# Altium PCB POT 10x8.PcbDoc (part 2 of 4)
Units mm, origin at the board's own origin, x right, y up, seen from the top; angles counter-clockwise.
Board outline 152.4 x 101.6 mm, 4 copper layers (Top Layer, Mid Layer 1, Mid Layer 2, Bottom Layer), stack 0.97 mm thick; 324 components, 355 nets, 1533 pads, 300 vias.
Unrouted connection lines stored in the file: 224.
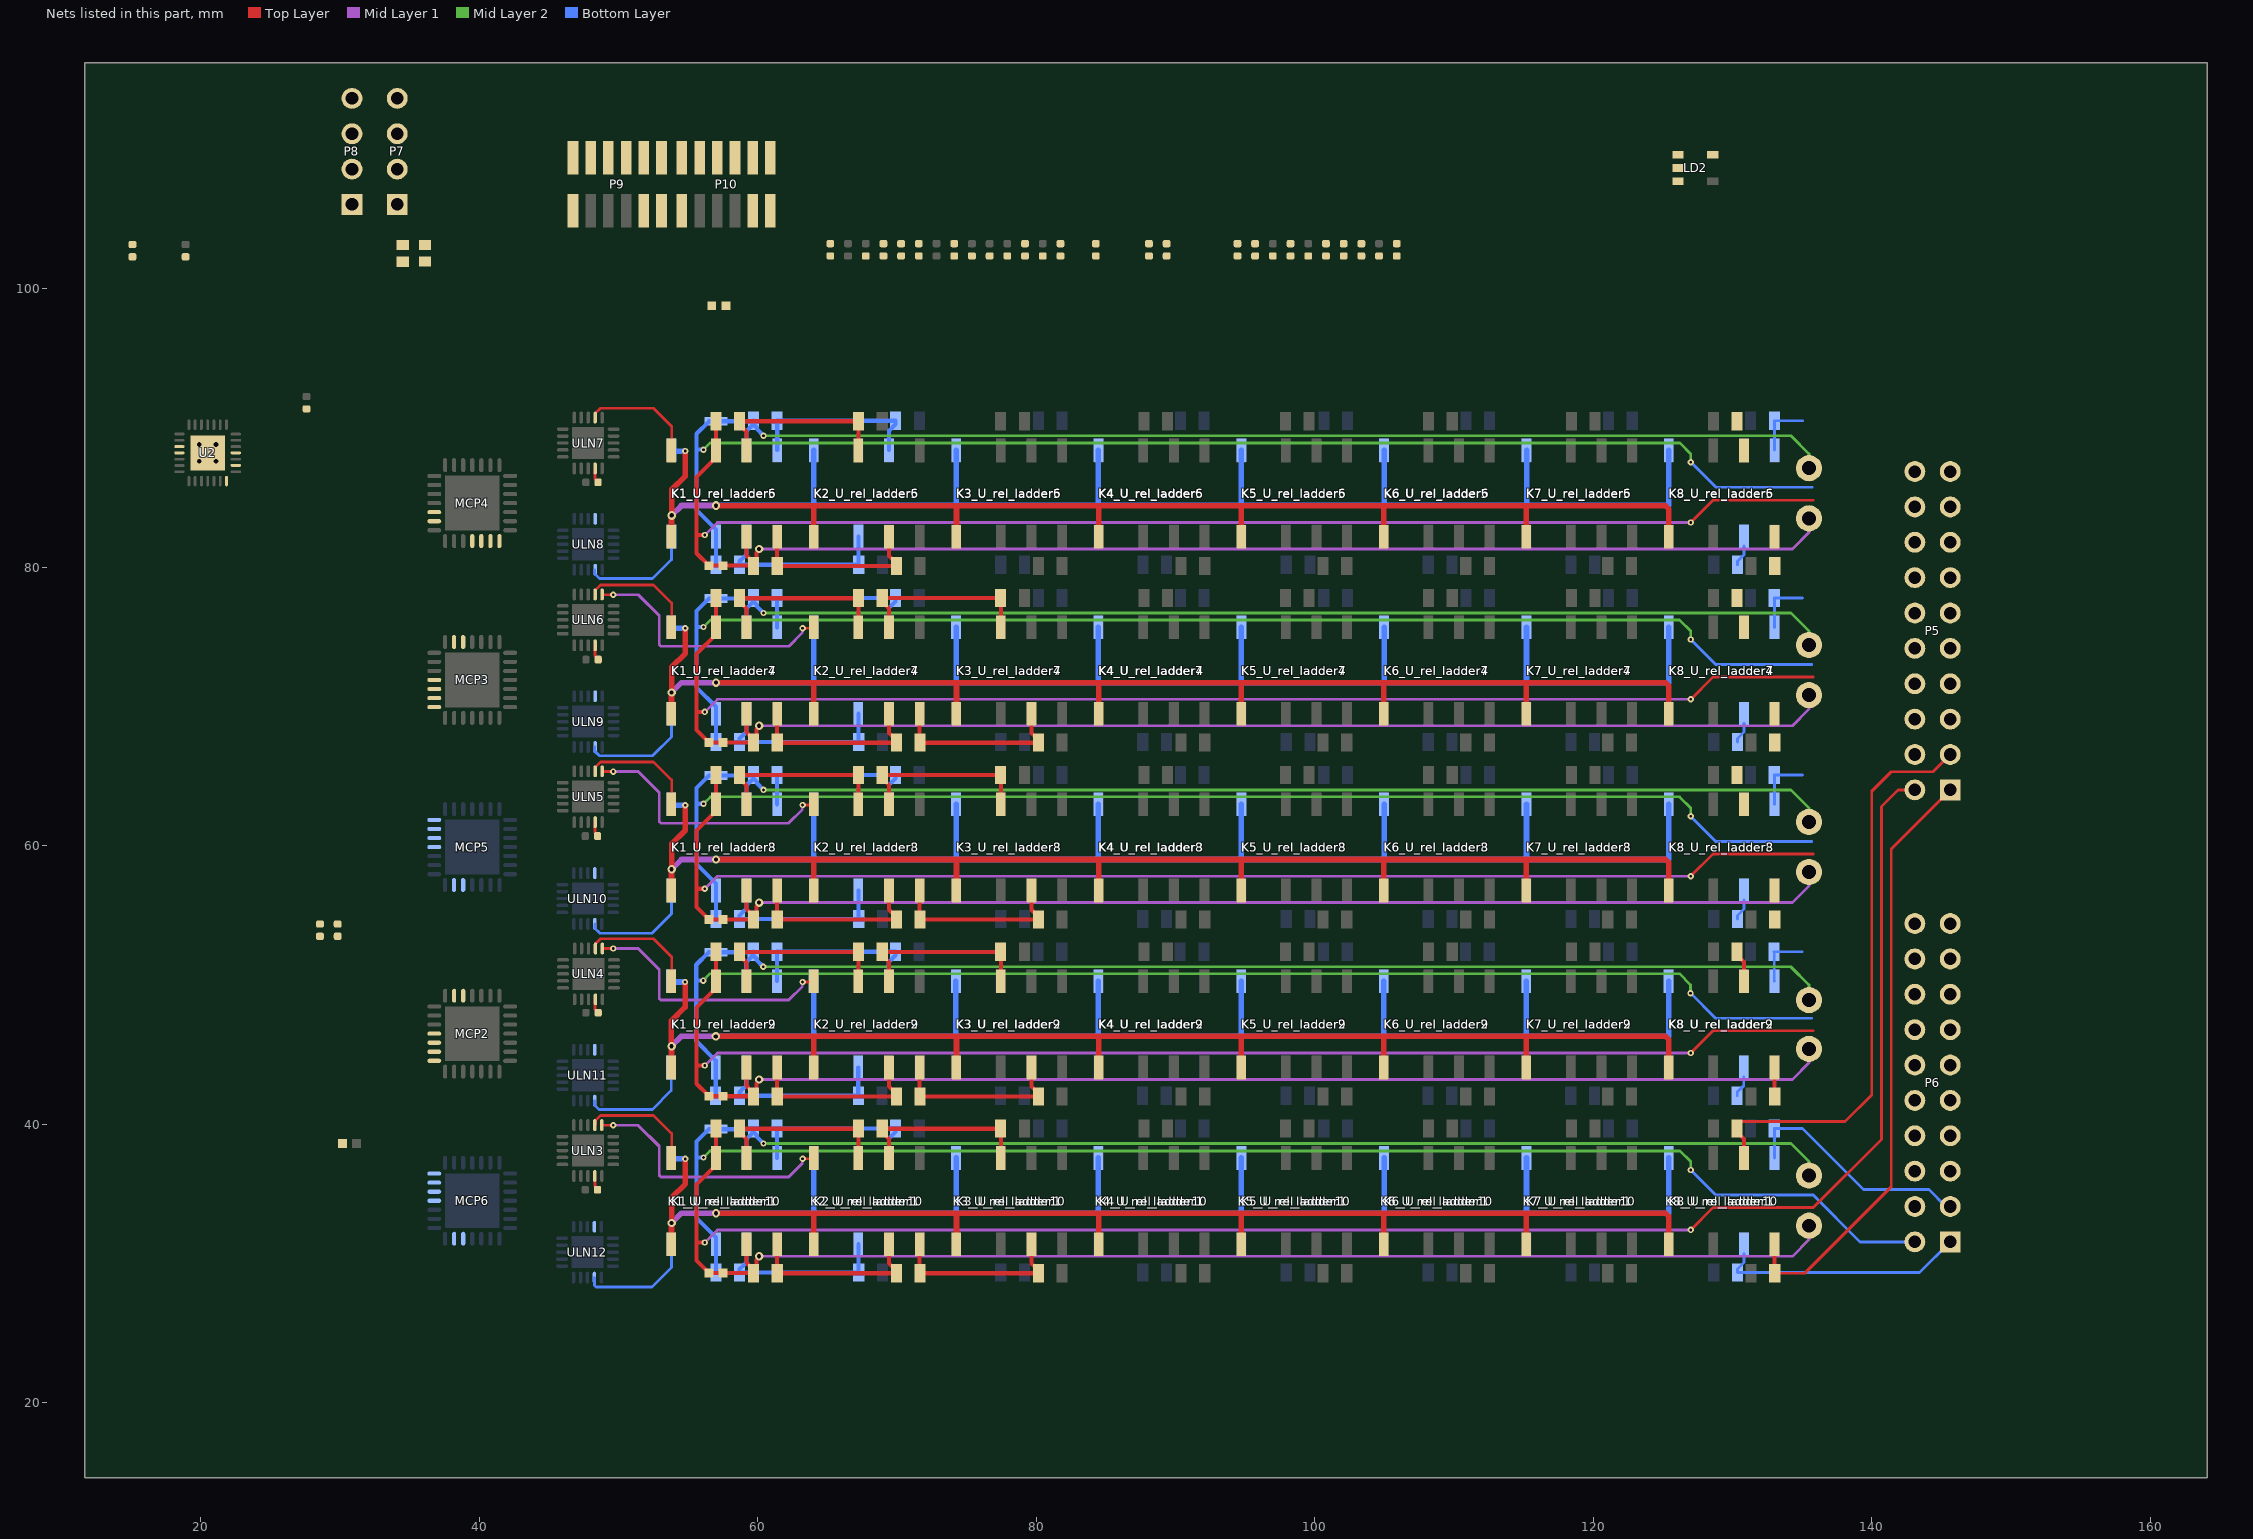
[diagram p4: the nets of this part, all layers, seen from the top]

## Part data
C10 C11 C12 C13 C14 C15 C16 C17 C18 C19 C20 C21 C22 C23 C24 C25 C26 C27 C28 C29 C30 C31 C32 C33 C34: library part C, "Capacitor"
J4: library part JMP_mini
K1_U_rel_ladder1 K1_U_rel_ladder2 K1_U_rel_ladder3 K1_U_rel_ladder4 K1_U_rel_ladder5 K1_U_rel_ladder6 K1_U_rel_ladder7 K1_U_rel_ladder8 K1_U_rel_ladder9 K1_U_rel_ladder10 K2_U_rel_ladder1 K2_U_rel_ladder2 K2_U_rel_ladder3 K2_U_rel_ladder4 K2_U_rel_ladder5 K2_U_rel_ladder6 K2_U_rel_ladder7 K2_U_rel_ladder8 K2_U_rel_ladder9 K2_U_rel_ladder10 K3_U_rel_ladder1 K3_U_rel_ladder2 K3_U_rel_ladder3 K3_U_rel_ladder4 K3_U_rel_ladder5 K3_U_rel_ladder6 K3_U_rel_ladder7 K3_U_rel_ladder8 K3_U_rel_ladder9 K3_U_rel_ladder10 K4_U_rel_ladder1 K4_U_rel_ladder2 K4_U_rel_ladder3 K4_U_rel_ladder4 K4_U_rel_ladder5 K4_U_rel_ladder6 K4_U_rel_ladder7 K4_U_rel_ladder8 K4_U_rel_ladder9 K4_U_rel_ladder10 K5_U_rel_ladder1 K5_U_rel_ladder2 K5_U_rel_ladder3 K5_U_rel_ladder4 K5_U_rel_ladder5 K5_U_rel_ladder6 K5_U_rel_ladder7 K5_U_rel_ladder8 K5_U_rel_ladder9 K5_U_rel_ladder10 K6_U_rel_ladder1 K6_U_rel_ladder2 K6_U_rel_ladder3 K6_U_rel_ladder4 K6_U_rel_ladder5 K6_U_rel_ladder6 K6_U_rel_ladder7 K6_U_rel_ladder8 K6_U_rel_ladder9 K6_U_rel_ladder10 K7_U_rel_ladder1 K7_U_rel_ladder2 K7_U_rel_ladder3 K7_U_rel_ladder4 K7_U_rel_ladder5 K7_U_rel_ladder6 K7_U_rel_ladder7 K7_U_rel_ladder8 K7_U_rel_ladder9 K7_U_rel_ladder10 K8_U_rel_ladder1 K8_U_rel_ladder2 K8_U_rel_ladder3 K8_U_rel_ladder4 K8_U_rel_ladder5 K8_U_rel_ladder6 K8_U_rel_ladder7 K8_U_rel_ladder8 K8_U_rel_ladder9 K8_U_rel_ladder10: library part "IM-GR Relay DPDT", "TE CONNECTIVITY  IM-GR  RELAY, DPDT, NO", Farnell ID=1175070, URL=http://si.farnell.com/te-connectivity-axicom/im06gr/relay-gull-wing-dpco-12vdc-2a/dp/1175070
P5 P6: "Header, 10-Pin, Dual row", LatestRevisionDate=17-Jul-2002, LatestRevisionNote="Re-released for DXP Platform.", Publisher="Altium Limited"
P7 P8: library part "Header 4", "Header, 4-Pin", LatestRevisionDate=17-Jul-2002, LatestRevisionNote="Re-released for DXP Platform.", Publisher="Altium Limited"
P9 P10: library part "Header 6X2", "Header, 6-Pin, Dual row", LatestRevisionDate=17-Jul-2002, LatestRevisionNote="Re-released for DXP Platform.", Publisher="Altium Limited"
R1_U_rel_ladder1 R1_U_rel_ladder2 R1_U_rel_ladder3 R1_U_rel_ladder4 R1_U_rel_ladder5 R1_U_rel_ladder6 R1_U_rel_ladder7 R1_U_rel_ladder8 R1_U_rel_ladder9 R1_U_rel_ladder10 R2_U_rel_ladder1 R2_U_rel_ladder2 R2_U_rel_ladder3 R2_U_rel_ladder4 R2_U_rel_ladder5 R2_U_rel_ladder6 R2_U_rel_ladder7 R2_U_rel_ladder8 R2_U_rel_ladder9 R2_U_rel_ladder10 R3_U_rel_ladder1 R3_U_rel_ladder2 R3_U_rel_ladder3 R3_U_rel_ladder4 R3_U_rel_ladder5 R3_U_rel_ladder6 R3_U_rel_ladder7 R3_U_rel_ladder8 R3_U_rel_ladder9 R3_U_rel_ladder10 R4_U_rel_ladder1 R4_U_rel_ladder2 R4_U_rel_ladder3 R4_U_rel_ladder4 R4_U_rel_ladder5 R4_U_rel_ladder6 R4_U_rel_ladder7 R4_U_rel_ladder8 R4_U_rel_ladder9 R4_U_rel_ladder10 R5_U_rel_ladder1 R5_U_rel_ladder2 R5_U_rel_ladder3 R5_U_rel_ladder4 R5_U_rel_ladder5 R5_U_rel_ladder6 R5_U_rel_ladder7 R5_U_rel_ladder8 R5_U_rel_ladder9 R5_U_rel_ladder10 R6_U_rel_ladder1 R6_U_rel_ladder2 R6_U_rel_ladder3 R6_U_rel_ladder4 R6_U_rel_ladder5 R6_U_rel_ladder6 R6_U_rel_ladder7 R6_U_rel_ladder8 R6_U_rel_ladder9 R6_U_rel_ladder10 R7_U_rel_ladder1 R7_U_rel_ladder2 R7_U_rel_ladder3 R7_U_rel_ladder4 R7_U_rel_ladder5 R7_U_rel_ladder6 R7_U_rel_ladder7 R7_U_rel_ladder8 R7_U_rel_ladder9 R7_U_rel_ladder10 R8_U_rel_ladder1 R8_U_rel_ladder2 R8_U_rel_ladder3 R8_U_rel_ladder4 R8_U_rel_ladder5 R8_U_rel_ladder6 R8_U_rel_ladder7 R8_U_rel_ladder8 R8_U_rel_ladder9 R8_U_rel_ladder10 R9_U_rel_ladder1 R9_U_rel_ladder2 R9_U_rel_ladder3 R9_U_rel_ladder4 R9_U_rel_ladder5 R9_U_rel_ladder6 R9_U_rel_ladder7 R9_U_rel_ladder8 R9_U_rel_ladder9 R9_U_rel_ladder10 R10_U_rel_ladder1 R10_U_rel_ladder2 R10_U_rel_ladder3 R10_U_rel_ladder4 R10_U_rel_ladder5 R10_U_rel_ladder6 R10_U_rel_ladder7 R10_U_rel_ladder8 R10_U_rel_ladder9 R10_U_rel_ladder10 R11_U_rel_ladder1 R11_U_rel_ladder2 R11_U_rel_ladder3 R11_U_rel_ladder4 R11_U_rel_ladder5 R11_U_rel_ladder6 R11_U_rel_ladder7 R11_U_rel_ladder8 R11_U_rel_ladder9 R11_U_rel_ladder10 R12_U_rel_ladder1 R12_U_rel_ladder2 R12_U_rel_ladder3 R12_U_rel_ladder4 R12_U_rel_ladder5 R12_U_rel_ladder6 R12_U_rel_ladder7 R12_U_rel_ladder8 R12_U_rel_ladder9 R12_U_rel_ladder10 R13_U_rel_ladder1 R13_U_rel_ladder2 R13_U_rel_ladder3 R13_U_rel_ladder4 R13_U_rel_ladder5 R13_U_rel_ladder6 R13_U_rel_ladder7 R13_U_rel_ladder8 R13_U_rel_ladder9 R13_U_rel_ladder10 R14_U_rel_ladder1 R14_U_rel_ladder2 R14_U_rel_ladder3 R14_U_rel_ladder4 R14_U_rel_ladder5 R14_U_rel_ladder6 R14_U_rel_ladder7 R14_U_rel_ladder8 R14_U_rel_ladder9 R14_U_rel_ladder10 R15_U_rel_ladder1 R15_U_rel_ladder2 R15_U_rel_ladder3 R15_U_rel_ladder4 R15_U_rel_ladder5 R15_U_rel_ladder6 R15_U_rel_ladder7 R15_U_rel_ladder8 R15_U_rel_ladder9 R15_U_rel_ladder10 R16_U_rel_ladder1 R16_U_rel_ladder2 R16_U_rel_ladder3 R16_U_rel_ladder4 R16_U_rel_ladder5 R16_U_rel_ladder6 R16_U_rel_ladder7 R16_U_rel_ladder8 R16_U_rel_ladder9 R16_U_rel_ladder10 R26 R27 R28 R29 R30 R31 R32 R33 R34 R35 R36 R37 R38: library part R, "R"
U2: "8-bit AVR Microcontroller, 1.8-5.5V, 8KB Flash, 64 Bytes EEPROM, 512 Bytes SRAM, 28-pin MLF, Industrial Grade (-40°C to 85°C), Pb-Free", Supplier Part Number 1=ATTINY88-MMU-ND, ComponentLink1Description="Manufacturer Link", ComponentLink1URL=http://www.atmel.com/products/avr/default.asp?, ComponentLink2Description="ATtiny48/88 Datasheet", ComponentLink2URL=http://www.atmel.com/dyn/resources/prod_documents/doc8008.pdf, ComponentLink3Description="ATtiny48/88 Summary", ComponentLink3URL=http://www.atmel.com/dyn/resources/prod_documents/8008S.pdf, ComponentLink4Description="Atmel.com Home", ComponentLink4URL=http://www.atmel.com, DatasheetVersion="revC, Mar-2009", PackageDescription="28-pad, 4x4x1.0mm Body, Pitch 0.45mm, 2.4x2.4mm Exposed Pad, Plastic Very Thin QFN Package (VQFN)", PackageReference=28M1, PackageVersion="revB, Nov-2008", Published=1-Apr-2010, Publisher="Altium Limited", Supplier 1=Digi-Key, Supplier 2=Mouser, Supplier Part Number 2=556-ATTINY88-MMU

## Via types
v1: diameter 0.45, hole 0.2, Top Layer to Bottom Layer, 186 vias
v2: diameter 0.5, hole 0.2, Top Layer to Bottom Layer, 85 vias
v3: diameter 0.6, hole 0.3, Top Layer to Bottom Layer, 25 vias
v4: diameter 0.66, hole 0.33, Top Layer to Bottom Layer, 4 vias

## Nets (pads, with @x,y where several pads share a name; then routed paths per layer and width w, separated by ;. In a path a pad name is that pad's centre, name@x,y a point inside that pad or via, vN(x,y) a via of type N, cw(c..) or ccw(c..) an arc to the next point about the centre after c; other vN are vias at no path point)
+3.3V: C10.2 C14.2 C18.2 C22.2 C26.2 C30.1 C31.1 C32.1 FB2.1 LD2.5 MCP2.5 MCP3.5 MCP3.11 MCP4.5 MCP4.12 MCP5.5 MCP5.11 MCP5.12 MCP6.5 MCP6.13 R26.1 R27.1 R28.1 R29.1 R34.1 R35.1 R36.1 R37.1 R38.1 U2.3
+5: C29.1 LD2.1 LD2.3 P7.2 P8.2
+12: C12.1 C13.1 C16.1 C17.1 C20.1 C21.1 C24.1 C25.1 C28.1 C34.1 K1_U_rel_ladder1.1 K1_U_rel_ladder2.1 K1_U_rel_ladder3.1 K1_U_rel_ladder4.1 K1_U_rel_ladder5.1 K1_U_rel_ladder6.1 K1_U_rel_ladder7.1 K1_U_rel_ladder8.1 K1_U_rel_ladder9.1 K1_U_rel_ladder10.1 K2_U_rel_ladder1.1 K2_U_rel_ladder2.1 K2_U_rel_ladder3.1 K2_U_rel_ladder4.1 K2_U_rel_ladder5.1 K2_U_rel_ladder6.1 K2_U_rel_ladder7.1 K2_U_rel_ladder8.1 K2_U_rel_ladder9.1 K2_U_rel_ladder10.1 K3_U_rel_ladder1.1 K3_U_rel_ladder2.1 K3_U_rel_ladder3.1 K3_U_rel_ladder4.1 K3_U_rel_ladder5.1 K3_U_rel_ladder6.1 K3_U_rel_ladder7.1 K3_U_rel_ladder8.1 K3_U_rel_ladder9.1 K3_U_rel_ladder10.1 K4_U_rel_ladder1.1 K4_U_rel_ladder2.1 K4_U_rel_ladder3.1 K4_U_rel_ladder4.1 K4_U_rel_ladder5.1 K4_U_rel_ladder6.1 K4_U_rel_ladder7.1 K4_U_rel_ladder8.1 K4_U_rel_ladder9.1 K4_U_rel_ladder10.1 K5_U_rel_ladder1.1 K5_U_rel_ladder2.1 K5_U_rel_ladder3.1 K5_U_rel_ladder4.1 K5_U_rel_ladder5.1 K5_U_rel_ladder6.1 K5_U_rel_ladder7.1 K5_U_rel_ladder8.1 K5_U_rel_ladder9.1 K5_U_rel_ladder10.1 K6_U_rel_ladder1.1 K6_U_rel_ladder2.1 K6_U_rel_ladder3.1 K6_U_rel_ladder4.1 K6_U_rel_ladder5.1 K6_U_rel_ladder6.1 K6_U_rel_ladder7.1 K6_U_rel_ladder8.1 K6_U_rel_ladder9.1 K6_U_rel_ladder10.1 K7_U_rel_ladder1.1 K7_U_rel_ladder2.1 K7_U_rel_ladder3.1 K7_U_rel_ladder4.1 K7_U_rel_ladder5.1 K7_U_rel_ladder6.1 K7_U_rel_ladder7.1 K7_U_rel_ladder8.1 K7_U_rel_ladder9.1 K7_U_rel_ladder10.1 K8_U_rel_ladder1.1 K8_U_rel_ladder2.1 K8_U_rel_ladder3.1 K8_U_rel_ladder4.1 K8_U_rel_ladder5.1 K8_U_rel_ladder6.1 K8_U_rel_ladder7.1 K8_U_rel_ladder8.1 K8_U_rel_ladder9.1 K8_U_rel_ladder10.1 P7.3 P8.3 ULN3.9 ULN4.9 ULN5.9 ULN6.9 ULN7.9 ULN8.9 ULN9.9 ULN10.9 ULN11.9 ULN12.9 | length 978.9
  Top Layer w0.2: ULN3.9@48.325,36.284 48.325,35.523 48.519,35.329 C12.1@48.519,35.293 ; ULN4.9@48.325,48.984 48.325,48.223 48.519,48.029 C13.1@48.519,47.993 ; ULN5.9@48.325,61.684 48.325,60.923 48.519,60.729 C16.1@48.519,60.693 ; ULN6.9@48.325,74.384 48.325,73.623 48.519,73.429 C17.1@48.519,73.393 ; ULN7.9@48.325,87.084 48.325,86.323 48.519,86.129 C20.1@48.519,86.093
  Top Layer w0.4: K1_U_rel_ladder1.1@53.796,31.368 53.807,31.379 53.807,32.882 v3(53.818,32.894) 53.818,34.718 54.8,35.7 v1(54.8,37.5) ; K1_U_rel_ladder2.1@53.796,44.068 53.807,44.079 53.807,45.582 v3(53.818,45.594) ; K1_U_rel_ladder3.1@53.796,56.768 53.807,56.779 53.807,58.282 v3(53.818,58.294) 53.818,60.118 54.8,61.1 v1(54.8,62.9) ; K1_U_rel_ladder4.1@53.796,69.468 53.807,69.479 53.807,70.982 v3(53.818,70.994) 53.818,72.818 54.8,73.8 v1(54.8,75.6) ; K1_U_rel_ladder5.1@53.796,82.168 53.807,82.179 53.807,83.682 v3(53.818,83.694) ; v3(53.804,45.594) 53.804,47.418 54.786,48.4 v1(54.786,50.2) ; v3(53.822,83.726) 53.822,85.55 54.804,86.532 v1(54.804,88.332) ; v3(57,33.6) 64.029,33.6 ; v3(57,46.3) 64.029,46.3 ; v3(57,59) 64.029,59 ; v3(57,71.7) 64.029,71.7 ; v3(57,84.4) 64.029,84.4 ; K2_U_rel_ladder1.1@64.041,31.38 K2_U_rel_ladder1.1@64.029,31.368 64.029,33.6 ; K2_U_rel_ladder2.1@64.041,44.08 K2_U_rel_ladder2.1@64.029,44.068 64.029,46.3 ; K2_U_rel_ladder3.1@64.041,56.78 K2_U_rel_ladder3.1@64.029,56.768 64.029,59 ; K2_U_rel_ladder4.1@64.041,69.48 K2_U_rel_ladder4.1@64.029,69.468 64.029,71.7 ; K2_U_rel_ladder5.1@64.041,82.18 K2_U_rel_ladder5.1@64.029,82.168 64.029,84.4 ; K3_U_rel_ladder1.1@74.261,31.368 74.273,31.38 74.273,33.6 ; K3_U_rel_ladder2.1@74.261,44.068 74.273,44.08 74.273,46.3 ; K3_U_rel_ladder3.1@74.261,56.768 74.273,56.78 74.273,59 ; K3_U_rel_ladder4.1@74.261,69.468 74.273,69.48 74.273,71.7 ; K3_U_rel_ladder5.1@74.261,82.168 74.273,82.18 74.273,84.4 ; K4_U_rel_ladder1.1@84.494,31.368 84.506,31.38 84.506,33.6 ; K4_U_rel_ladder2.1@84.494,44.068 84.506,44.08 84.506,46.3 ; K4_U_rel_ladder3.1@84.494,56.768 84.506,56.78 84.506,59 ; K4_U_rel_ladder4.1@84.494,69.468 84.506,69.48 84.506,71.7 ; K4_U_rel_ladder5.1@84.494,82.168 84.506,82.18 84.506,84.4 ; K5_U_rel_ladder1.1@94.726,31.368 94.738,31.38 94.738,33.6 ; K5_U_rel_ladder2.1@94.726,44.068 94.738,44.08 94.738,46.3 ; K5_U_rel_ladder3.1@94.726,56.768 94.738,56.78 94.738,59 ; K5_U_rel_ladder4.1@94.726,69.468 94.738,69.48 94.738,71.7 ; K5_U_rel_ladder5.1@94.726,82.168 94.738,82.18 94.738,84.4 ; K6_U_rel_ladder1.1@104.959,31.368 104.971,31.38 104.971,33.6 ; K6_U_rel_ladder2.1@104.959,44.068 104.971,44.08 104.971,46.3 ; K6_U_rel_ladder3.1@104.959,56.768 104.971,56.78 104.971,59 ; K6_U_rel_ladder4.1@104.959,69.468 104.971,69.48 104.971,71.7 ; K6_U_rel_ladder5.1@104.959,82.168 104.971,82.18 104.971,84.4 ; K7_U_rel_ladder1.1@115.191,31.368 115.203,31.38 115.203,33.6 ; K7_U_rel_ladder2.1@115.191,44.068 115.203,44.08 115.203,46.3 ; K7_U_rel_ladder3.1@115.191,56.768 115.203,56.78 115.203,59 ; K7_U_rel_ladder4.1@115.191,69.468 115.203,69.48 115.203,71.7 ; K7_U_rel_ladder5.1@115.191,82.168 115.203,82.18 115.203,84.4 ; K8_U_rel_ladder1.1@125.424,31.368 125.436,31.38 125.436,33.366 125.202,33.6 115.203,33.6 ; K8_U_rel_ladder2.1@125.424,44.068 125.436,44.08 125.436,46.066 125.202,46.3 115.203,46.3 ; K8_U_rel_ladder3.1@125.424,56.768 125.436,56.78 125.436,58.766 125.202,59 115.203,59 ; K8_U_rel_ladder4.1@125.424,69.468 125.436,69.48 125.436,71.466 125.202,71.7 115.203,71.7 ; K8_U_rel_ladder5.1@125.424,82.168 125.436,82.18 125.436,84.166 125.202,84.4 115.203,84.4 ; 64.029,33.6 74.273,33.6 ; 64.029,46.3 74.273,46.3 ; 64.029,59 74.273,59 ; 64.029,71.7 74.273,71.7 ; 64.029,84.4 74.273,84.4 ; 74.273,33.6 84.506,33.6 ; 74.273,46.3 84.506,46.3 ; 74.273,59 84.506,59 ; 74.273,71.7 84.506,71.7 ; 74.273,84.4 84.506,84.4 ; 84.506,33.6 94.738,33.6 ; 84.506,46.3 94.738,46.3 ; 84.506,59 94.738,59 ; 84.506,71.7 94.738,71.7 ; 84.506,84.4 94.738,84.4 ; 94.738,33.6 104.971,33.6 ; 94.738,46.3 104.971,46.3 ; 94.738,59 104.971,59 ; 94.738,71.7 104.971,71.7 ; 94.738,84.4 104.971,84.4 ; 104.971,33.6 115.203,33.6 ; 104.971,46.3 115.203,46.3 ; 104.971,59 115.203,59 ; 104.971,71.7 115.203,71.7 ; 104.971,84.4 115.203,84.4
  Mid Layer 1 w0.4: v3(53.804,45.594) 54.51,46.3 v3(56.986,46.3) ; v3(53.818,45.594) 54.525,46.3 v3(57,46.3) ; v3(53.818,83.694) 54.525,84.4 v3(57,84.4) ; v3(53.822,83.726) 54.529,84.432 v3(57.004,84.432) ; 54.525,33.6 v3(57,33.6) 54.525,33.6 ; 54.525,33.6 v3(53.818,32.894) 54.525,33.6 ; 54.525,59 v3(57,59) 54.525,59 ; 54.525,59 v3(53.818,58.294) 54.525,59 ; 54.525,71.7 v3(57,71.7) 54.525,71.7 ; 54.525,71.7 v3(53.818,70.994) 54.525,71.7
  Bottom Layer w0.4: K1_U_rel_ladder9.1@53.782,50.268 53.85,50.2 v1(54.786,50.2) ; v3@53.793,45.605 v3(53.804,45.594) ; K1_U_rel_ladder10.1@53.796,37.568 53.864,37.5 v1(54.8,37.5) ; K1_U_rel_ladder8.1@53.796,62.968 53.864,62.9 v1(54.8,62.9) ; K1_U_rel_ladder7.1@53.796,75.668 53.864,75.6 v1(54.8,75.6) ; K1_U_rel_ladder6.1@53.8,88.4 53.868,88.332 v1(54.804,88.332) ; v3@53.807,32.905 v3(53.818,32.894) ; v3@53.807,58.305 v3(53.818,58.294) ; v3@53.807,71.005 v3(53.818,70.994) ; v3@53.811,83.737 v3(53.822,83.726) ; v3(56.986,46.3) 64.014,46.3 ; v3(57,33.6) 64.029,33.6 ; v3(57,59) 64.029,59 ; v3(57,71.7) 64.029,71.7 ; v3(57.004,84.432) 64.033,84.432 ; K2_U_rel_ladder9.1@64.014,50.268 64.014,46.3 ; K2_U_rel_ladder10.1@64.029,37.568 64.029,33.6 ; K2_U_rel_ladder8.1@64.029,62.968 64.029,59 ; K2_U_rel_ladder7.1@64.029,75.668 64.029,71.7 ; K2_U_rel_ladder6.1@64.033,88.4 64.033,84.432 ; K3_U_rel_ladder9.1@74.234,50.268 74.234,46.3 ; K3_U_rel_ladder10.1@74.248,37.568 74.248,33.6 ; K3_U_rel_ladder8.1@74.248,62.968 74.248,59 ; K3_U_rel_ladder7.1@74.248,75.668 74.248,71.7 ; K3_U_rel_ladder6.1@74.252,88.4 74.252,84.432 ; K4_U_rel_ladder9.1@84.45,50.268 84.45,46.3 ; K4_U_rel_ladder10.1@84.464,37.568 84.464,33.6 ; K4_U_rel_ladder8.1@84.464,62.968 84.464,59 ; K4_U_rel_ladder7.1@84.464,75.668 84.464,71.7 ; K4_U_rel_ladder6.1@84.468,88.4 84.468,84.432 ; K5_U_rel_ladder9.1@94.721,50.268 94.721,46.3 ; K5_U_rel_ladder10.1@94.735,37.568 94.735,33.6 ; K5_U_rel_ladder8.1@94.735,62.968 94.735,59 ; K5_U_rel_ladder7.1@94.735,75.668 94.735,71.7 ; K5_U_rel_ladder6.1@94.739,88.4 94.739,84.432 ; K6_U_rel_ladder9.1@104.966,50.268 104.966,46.3 ; K6_U_rel_ladder10.1@104.98,37.568 104.98,33.6 ; K6_U_rel_ladder8.1@104.98,62.968 104.98,59 ; K6_U_rel_ladder7.1@104.98,75.668 104.98,71.7 ; K6_U_rel_ladder6.1@104.984,88.4 104.984,84.432 ; K7_U_rel_ladder9.1@115.196,50.268 115.196,46.3 ; K7_U_rel_ladder10.1@115.21,37.568 115.21,33.6 ; K7_U_rel_ladder8.1@115.21,62.968 115.21,59 ; K7_U_rel_ladder7.1@115.21,75.668 115.21,71.7 ; K7_U_rel_ladder6.1@115.214,88.4 115.214,84.432 ; K8_U_rel_ladder9.1@125.41,50.268 125.41,46.3 115.196,46.3 ; K8_U_rel_ladder10.1@125.424,37.568 125.424,33.6 115.21,33.6 ; K8_U_rel_ladder8.1@125.424,62.968 125.424,59 115.21,59 ; K8_U_rel_ladder7.1@125.424,75.668 125.424,71.7 115.21,71.7 ; K8_U_rel_ladder6.1@125.428,88.4 125.428,84.432 115.214,84.432 ; 64.014,46.3 74.234,46.3 ; 64.029,33.6 74.248,33.6 ; 64.029,59 74.248,59 ; 64.029,71.7 74.248,71.7 ; 64.033,84.432 74.252,84.432 ; 74.234,46.3 84.45,46.3 ; 74.248,33.6 84.464,33.6 ; 74.248,59 84.464,59 ; 74.248,71.7 84.464,71.7 ; 74.252,84.432 84.468,84.432 ; 84.45,46.3 94.721,46.3 ; 84.464,33.6 94.735,33.6 ; 84.464,59 94.735,59 ; 84.464,71.7 94.735,71.7 ; 84.468,84.432 94.739,84.432 ; 94.721,46.3 104.966,46.3 ; 94.735,33.6 104.98,33.6 ; 94.735,59 104.98,59 ; 94.735,71.7 104.98,71.7 ; 94.739,84.432 104.984,84.432 ; 104.966,46.3 115.196,46.3 ; 104.98,33.6 115.21,33.6 ; 104.98,59 115.21,59 ; 104.98,71.7 115.21,71.7 ; 104.984,84.432 115.214,84.432
  other v3: 53.818,32.894 57,33.6 53.818,58.294 57,59 53.818,70.994 57,71.7
A1: K8_U_rel_ladder1.6 P5.3 R1_U_rel_ladder1.1 | length 41.1
  Top Layer w0.2: R1_U_rel_ladder1.1@130.578,40.175 138.075,40.175 140,42.1 140,63.9 141.4,65.3 144.4,65.3 P5.3@145.64,66.54
  Top Layer w0.3: R1_U_rel_ladder1.1@130.328,39.675 130.328,39.425 130.824,38.929 K8_U_rel_ladder1.6@130.824,37.568
A2: K8_U_rel_ladder2.6 P5.7 R1_U_rel_ladder2.1 | length 2.3
  Top Layer w0.3: R1_U_rel_ladder2.1@130.328,52.375 130.328,52.125 130.824,51.629 K8_U_rel_ladder2.6@130.824,50.268
A3: K8_U_rel_ladder3.6 P5.11 R1_U_rel_ladder3.1
A4: K8_U_rel_ladder4.6 P5.15 R1_U_rel_ladder4.1
A5: K8_U_rel_ladder5.6 P5.19 R1_U_rel_ladder5.1
A6: K8_U_rel_ladder6.6 P6.17 R1_U_rel_ladder6.1 | length 1.6
  Bottom Layer w0.2: R1_U_rel_ladder6.1@130.356,80.166 130.356,80.416 130.828,80.888 K8_U_rel_ladder6.6@130.828,81.521
A7: K8_U_rel_ladder7.6 P6.13 R1_U_rel_ladder7.1 | length 1.6
  Bottom Layer w0.2: R1_U_rel_ladder7.1@130.352,67.434 130.352,67.684 130.824,68.156 K8_U_rel_ladder7.6@130.824,68.789
A8: K8_U_rel_ladder8.6 P6.9 R1_U_rel_ladder8.1 | length 1.6
  Bottom Layer w0.2: R1_U_rel_ladder8.1@130.352,54.734 130.352,54.984 130.824,55.456 K8_U_rel_ladder8.6@130.824,56.089
A9: K8_U_rel_ladder9.6 P6.5 R1_U_rel_ladder9.1 | length 1.6
  Bottom Layer w0.2: R1_U_rel_ladder9.1@130.338,42.034 130.338,42.284 130.81,42.756 K8_U_rel_ladder9.6@130.81,43.389
A10: K8_U_rel_ladder10.6 P6.1 R1_U_rel_ladder10.1 | length 17.8
  Bottom Layer w0.2: K8_U_rel_ladder10.6@130.824,30.689 130.824,30.056 130.352,29.584 R1_U_rel_ladder10.1@130.352,29.334 143.434,29.334 P6.1@145.64,31.54
AGND: P5.4 P5.8 P5.12 P5.16 P5.20 P6.4 P6.8 P6.12 P6.16 P6.20
AVCC: C33.1 FB2.2 U2.16
B1: J2_U_rel_ladder1.1 J2_U_rel_ladder1.2 K1_U_rel_ladder1.3 K1_U_rel_ladder1.7 P5.2 R15_U_rel_ladder1.2 R16_U_rel_ladder1.2 TP3.1 | length 209.8
  Top Layer w0.2: v1(127.002,32.402) 128.602,34.002 135.802,34.002 ; 135.8,34 140.7,38.9 140.7,62.8 141.9,64 P5.2@143.1,64
  Top Layer w0.3: v1(56.202,31.502) 55.602,31.502 ; R15_U_rel_ladder1.2@57.002,39.677 R15_U_rel_ladder1.2@57,39.675 57,37.572 56.998,37.57 56.998,37.07 55.602,35.674 55.602,31.502 ; K1_U_rel_ladder1.3@59.196,31.368 59.198,30.05 59.424,29.824 59.696,29.552 R16_U_rel_ladder1.2@59.708,29.54 ; v3(60.102,30.502) 60.102,30.421 59.908,30.227 59.908,29.752 59.708,29.552 59.708,29.29 59.696,29.302 57.51,29.302 56.494,29.302 55.602,30.194 55.602,31.502
  Mid Layer 1 w0.2: v1(56.202,31.502) 57.102,32.402 v1(127.002,32.402) ; v3(60.102,30.502) 134.302,30.502 135.502,31.702 TP3.1@135.502,32.702
B2: J2_U_rel_ladder2.1 J2_U_rel_ladder2.2 K1_U_rel_ladder2.3 K1_U_rel_ladder2.7 P5.6 R15_U_rel_ladder2.2 R16_U_rel_ladder2.2 TP4.1 | length 176.1
  Top Layer w0.2: v1(127.002,45.102) 128.602,46.702 135.802,46.702
  Top Layer w0.3: v1(56.202,44.202) 55.602,44.202 ; R15_U_rel_ladder2.2@57.002,52.377 R15_U_rel_ladder2.2@57,52.375 57,50.272 56.998,50.27 56.998,49.77 55.602,48.374 55.602,44.202 ; K1_U_rel_ladder2.3@59.196,44.068 59.198,42.75 59.424,42.524 59.696,42.252 R16_U_rel_ladder2.2@59.708,42.24 ; v3(60.102,43.202) 60.102,43.121 59.908,42.927 59.908,42.452 59.708,42.252 59.708,41.99 59.696,42.002 57.51,42.002 56.494,42.002 55.602,42.894 55.602,44.202
  Mid Layer 1 w0.2: v1(56.202,44.202) 57.102,45.102 v1(127.002,45.102) ; v3(60.102,43.202) 134.302,43.202 135.502,44.402 TP4.1@135.502,45.402
B3: J2_U_rel_ladder3.1 J2_U_rel_ladder3.2 K1_U_rel_ladder3.3 K1_U_rel_ladder3.7 P5.10 R15_U_rel_ladder3.2 R16_U_rel_ladder3.2 TP5.1 | length 176.1
  Top Layer w0.2: v1(127.002,57.802) 128.602,59.402 135.802,59.402
  Top Layer w0.3: v1(56.202,56.902) 55.602,56.902 ; R15_U_rel_ladder3.2@57.002,65.077 R15_U_rel_ladder3.2@57,65.075 57,62.972 56.998,62.97 56.998,62.47 55.602,61.074 55.602,56.902 ; K1_U_rel_ladder3.3@59.196,56.768 59.198,55.45 59.424,55.224 59.696,54.952 R16_U_rel_ladder3.2@59.708,54.94 ; v3(60.102,55.902) 60.102,55.821 59.908,55.627 59.908,55.152 59.708,54.952 59.708,54.69 59.696,54.702 57.51,54.702 56.494,54.702 55.602,55.594 55.602,56.902
  Mid Layer 1 w0.2: v1(56.202,56.902) 57.102,57.802 v1(127.002,57.802) ; v3(60.102,55.902) 134.302,55.902 135.502,57.102 TP5.1@135.502,58.102
B4: J2_U_rel_ladder4.1 J2_U_rel_ladder4.2 K1_U_rel_ladder4.3 K1_U_rel_ladder4.7 P5.14 R15_U_rel_ladder4.2 R16_U_rel_ladder4.2 TP6.1 | length 176.1
  Top Layer w0.2: v1(127.002,70.502) 128.602,72.102 135.802,72.102
  Top Layer w0.3: v1(56.202,69.602) 55.602,69.602 ; R15_U_rel_ladder4.2@57.002,77.777 R15_U_rel_ladder4.2@57,77.775 57,75.672 56.998,75.67 56.998,75.17 55.602,73.774 55.602,69.602 ; K1_U_rel_ladder4.3@59.196,69.468 59.198,68.15 59.424,67.924 59.696,67.652 R16_U_rel_ladder4.2@59.708,67.64 ; v3(60.102,68.602) 60.102,68.521 59.908,68.327 59.908,67.852 59.708,67.652 59.708,67.39 59.696,67.402 57.51,67.402 56.494,67.402 55.602,68.294 55.602,69.602
  Mid Layer 1 w0.2: v1(56.202,69.602) 57.102,70.502 v1(127.002,70.502) ; v3(60.102,68.602) 134.302,68.602 135.502,69.802 TP6.1@135.502,70.802
B5: J2_U_rel_ladder5.1 J2_U_rel_ladder5.2 K1_U_rel_ladder5.3 K1_U_rel_ladder5.7 P5.18 R15_U_rel_ladder5.2 R16_U_rel_ladder5.2 TP7.1 | length 176.1
  Top Layer w0.2: v1(127.002,83.202) 128.602,84.802 135.802,84.802
  Top Layer w0.3: v1(56.202,82.302) 55.602,82.302 ; R15_U_rel_ladder5.2@57.002,90.477 R15_U_rel_ladder5.2@57,90.475 57,88.372 56.998,88.37 56.998,87.87 55.602,86.474 55.602,82.302 ; K1_U_rel_ladder5.3@59.196,82.168 59.198,80.85 59.424,80.624 59.696,80.352 R16_U_rel_ladder5.2@59.708,80.34 ; v3(60.102,81.302) 60.102,81.221 59.908,81.027 59.908,80.552 59.708,80.352 59.708,80.09 59.696,80.102 57.51,80.102 56.494,80.102 55.602,80.994 55.602,82.302
  Mid Layer 1 w0.2: v1(56.202,82.302) 57.102,83.202 v1(127.002,83.202) ; v3(60.102,81.302) 134.302,81.302 135.502,82.502 TP7.1@135.502,83.502
B6: J2_U_rel_ladder6.1 J2_U_rel_ladder6.2 K1_U_rel_ladder6.3 K1_U_rel_ladder6.7 P6.18 R15_U_rel_ladder6.2 R16_U_rel_ladder6.2 TP8.1 | length 176.8
  Mid Layer 2 w0.2: v1(56.104,88.432) 56.572,88.9 126.236,88.9 127.004,88.132 v1(127.004,87.532) ; v1(60.418,89.432) 134.204,89.432 135.504,88.132 TP8.1@135.504,86.832
  Bottom Layer w0.2: v1(127.004,87.532) 128.804,85.732 135.704,85.732
  Bottom Layer w0.3: v1(56.104,88.432) 55.606,88.432 ; R15_U_rel_ladder6.2@56.999,80.166 57,80.416 K1_U_rel_ladder6.7@57,82.2 ; K1_U_rel_ladder6.7@57,82.221 57,82.7 55.606,84.094 55.606,88.432 ; K1_U_rel_ladder6.3@59.2,88.4 59.2,89.763 R16_U_rel_ladder6.2@59.694,90.257 ; v1(60.418,89.432) 59.944,89.907 59.944,90.007 R16_U_rel_ladder6.2@59.694,90.257 ; 55.606,88.432 55.606,89.574 J2_U_rel_ladder6.1@56.498,90.466 J2_U_rel_ladder6.2@57.514,90.466 59.652,90.466 R16_U_rel_ladder6.2@59.694,90.507 R16_U_rel_ladder6.2@59.694,90.257
B7: J2_U_rel_ladder7.1 J2_U_rel_ladder7.2 K1_U_rel_ladder7.3 K1_U_rel_ladder7.7 P6.14 R15_U_rel_ladder7.2 R16_U_rel_ladder7.2 TP9.1 | length 176.8
  Mid Layer 2 w0.2: v1(56.1,75.7) 56.6,76.2 126.2,76.2 127,75.4 v1(127,74.8) ; v1(60.414,76.7) 134.2,76.7 135.5,75.4 TP9.1@135.5,74.1
  Bottom Layer w0.2: v1(127,74.8) 128.8,73 135.7,73
  Bottom Layer w0.3: v1(56.1,75.7) 55.602,75.7 ; R15_U_rel_ladder7.2@56.995,67.434 56.996,67.684 K1_U_rel_ladder7.7@56.996,69.468 ; K1_U_rel_ladder7.7@56.996,69.489 56.996,69.968 55.602,71.362 55.602,75.7 ; K1_U_rel_ladder7.3@59.196,75.668 59.196,77.031 R16_U_rel_ladder7.2@59.69,77.525 ; v1(60.414,76.7) 59.94,77.175 59.94,77.275 R16_U_rel_ladder7.2@59.69,77.525 ; 55.602,75.7 55.602,76.842 J2_U_rel_ladder7.1@56.494,77.734 J2_U_rel_ladder7.2@57.51,77.734 59.648,77.734 R16_U_rel_ladder7.2@59.69,77.775 R16_U_rel_ladder7.2@59.69,77.525
B8: J2_U_rel_ladder8.1 J2_U_rel_ladder8.2 K1_U_rel_ladder8.3 K1_U_rel_ladder8.7 P6.10 R15_U_rel_ladder8.2 R16_U_rel_ladder8.2 TP10.1 | length 176.8
  Mid Layer 2 w0.2: v1(56.1,63) 56.6,63.5 126.2,63.5 127,62.7 v1(127,62.1) ; v1(60.414,64) 134.2,64 135.5,62.7 TP10.1@135.5,61.4
  Bottom Layer w0.2: v1(127,62.1) 128.8,60.3 135.7,60.3
  Bottom Layer w0.3: v1(56.1,63) 55.602,63 ; R15_U_rel_ladder8.2@56.995,54.734 56.996,54.984 K1_U_rel_ladder8.7@56.996,56.768 ; K1_U_rel_ladder8.7@56.996,56.789 56.996,57.268 55.602,58.662 55.602,63 ; K1_U_rel_ladder8.3@59.196,62.968 59.196,64.331 R16_U_rel_ladder8.2@59.69,64.825 ; v1(60.414,64) 59.94,64.475 59.94,64.575 R16_U_rel_ladder8.2@59.69,64.825 ; 55.602,63 55.602,64.142 J2_U_rel_ladder8.1@56.494,65.034 J2_U_rel_ladder8.2@57.51,65.034 59.648,65.034 R16_U_rel_ladder8.2@59.69,65.075 R16_U_rel_ladder8.2@59.69,64.825
B9: J2_U_rel_ladder9.1 J2_U_rel_ladder9.2 K1_U_rel_ladder9.3 K1_U_rel_ladder9.7 P6.6 R15_U_rel_ladder9.2 R16_U_rel_ladder9.2 TP11.1 | length 176.8
  Mid Layer 2 w0.2: v1(56.086,50.3) 56.586,50.8 126.186,50.8 126.986,50 v1(126.986,49.4) ; v1(60.4,51.3) 134.186,51.3 135.486,50 TP11.1@135.486,48.7
  Bottom Layer w0.2: v1(126.986,49.4) 128.786,47.6 135.686,47.6
  Bottom Layer w0.3: v1(56.086,50.3) 55.588,50.3 ; R15_U_rel_ladder9.2@56.981,42.034 56.981,42.284 K1_U_rel_ladder9.7@56.981,44.068 ; K1_U_rel_ladder9.7@56.982,44.089 56.982,44.568 55.588,45.962 55.588,50.3 ; K1_U_rel_ladder9.3@59.182,50.268 59.182,51.631 R16_U_rel_ladder9.2@59.675,52.125 ; v1(60.4,51.3) 59.925,51.775 59.925,51.875 R16_U_rel_ladder9.2@59.675,52.125 ; 55.588,50.3 55.588,51.442 J2_U_rel_ladder9.1@56.48,52.334 J2_U_rel_ladder9.2@57.496,52.334 59.634,52.334 R16_U_rel_ladder9.2@59.675,52.375 R16_U_rel_ladder9.2@59.675,52.125
B10: J2_U_rel_ladder10.1 J2_U_rel_ladder10.2 K1_U_rel_ladder10.3 K1_U_rel_ladder10.7 P6.2 R15_U_rel_ladder10.2 R16_U_rel_ladder10.2 TP12.1 | length 185.5
  Mid Layer 2 w0.2: v1(56.1,37.6) 56.561,38.061 126.239,38.061 127,37.3 v1(127,36.7) ; v1(60.414,38.6) 134.2,38.6 135.5,37.3 TP12.1@135.5,36
  Bottom Layer w0.2: v1(127,36.7) 128.8,34.9 135.8,34.9 139.16,31.54 P6.2@143.1,31.54
  Bottom Layer w0.3: v1(56.1,37.6) 55.602,37.6 ; R15_U_rel_ladder10.2@56.995,29.334 K1_U_rel_ladder10.7@56.996,31.368 ; K1_U_rel_ladder10.7@56.996,31.389 56.996,31.868 55.602,33.262 55.602,37.6 ; K1_U_rel_ladder10.3@59.196,37.568 59.196,38.931 R16_U_rel_ladder10.2@59.69,39.425 ; v1(60.414,38.6) 59.94,39.075 59.94,39.175 R16_U_rel_ladder10.2@59.69,39.425 ; 55.602,37.6 55.602,38.742 J2_U_rel_ladder10.1@56.494,39.634 J2_U_rel_ladder10.2@57.51,39.634 59.648,39.634 R16_U_rel_ladder10.2@59.69,39.675 R16_U_rel_ladder10.2@59.69,39.425
C1: K8_U_rel_ladder1.4 P5.1 R2_U_rel_ladder1.1 | length 43.3
  Top Layer w0.2: R2_U_rel_ladder1.1@133.034,29.288 135.188,29.288 141.4,35.5 141.4,59.76 145.04,63.4 P5.1@145.64,64
  Top Layer w0.3: K8_U_rel_ladder1.4@133.024,31.368 133.029,31.363 133.029,29.293 R2_U_rel_ladder1.1@133.034,29.288
C2: K8_U_rel_ladder2.4 P5.5 R2_U_rel_ladder2.1 | length 2.1
  Top Layer w0.3: K8_U_rel_ladder2.4@133.024,44.068 133.029,44.063 133.029,41.993 R2_U_rel_ladder2.1@133.034,41.988
C3: K8_U_rel_ladder3.4 P5.9 R2_U_rel_ladder3.1
C4: K8_U_rel_ladder4.4 P5.13 R2_U_rel_ladder4.1
C5: K8_U_rel_ladder5.4 P5.17 R2_U_rel_ladder5.1
C6: K8_U_rel_ladder6.4 P6.19 R2_U_rel_ladder6.1 | length 4.1
  Bottom Layer w0.2: K8_U_rel_ladder6.4@133.028,88.4 133.017,88.411 133.017,90.496 R2_U_rel_ladder6.1@133.006,90.507 135.029,90.507
C7: K8_U_rel_ladder7.4 P6.15 R2_U_rel_ladder7.1 | length 4.1
  Bottom Layer w0.2: K8_U_rel_ladder7.4@133.024,75.668 133.013,75.679 133.013,77.764 R2_U_rel_ladder7.1@133.002,77.775 135.025,77.775
C8: K8_U_rel_ladder8.4 P6.11 R2_U_rel_ladder8.1 | length 4.1
  Bottom Layer w0.2: K8_U_rel_ladder8.4@133.024,62.968 133.013,62.979 133.013,65.064 R2_U_rel_ladder8.1@133.002,65.075 135.025,65.075
C9: K8_U_rel_ladder9.4 P6.7 R2_U_rel_ladder9.1 | length 4.1
  Bottom Layer w0.2: K8_U_rel_ladder9.4@133.01,50.268 132.999,50.279 132.999,52.364 R2_U_rel_ladder9.1@132.988,52.375 135.011,52.375
C10: K8_U_rel_ladder10.4 P6.3 R2_U_rel_ladder10.1 | length 17.1
  Bottom Layer w0.2: K8_U_rel_ladder10.4@133.024,37.568 133.013,37.579 133.013,39.664 R2_U_rel_ladder10.1@133.002,39.675 135.025,39.675 139.4,35.3 144.1,35.3 145.32,34.08 P6.3@145.64,34.08
GND: C10.1 C11.1 C14.1 C15.1 C18.1 C19.1 C22.1 C23.1 C26.1 C27.1 C29.2 C30.2 C31.2 C32.2 C33.2 J5.2 LD2.2 MCP2.6 MCP2.11 MCP2.12 MCP2.13 MCP3.6 MCP3.12 MCP3.13 MCP4.6 MCP4.11 MCP4.13 MCP5.6 MCP5.13 MCP6.6 MCP6.11 MCP6.12 P7.1 P7.4 P8.1 P8.4 P9.1 P9.3 P9.5 P9.7 P9.9 P9.11 P10.1 P10.3 P10.5 P10.7 P10.9 P10.11 U2.4 U2.18 U2.29
  other v4: 19.9,87.6 21.1,87.6 19.9,88.8 21.1,88.8
INT: P9.12 P10.12 R33.1 R36.2
MISO: J4.2 P9.2 P10.2
MISO_T88: J4.1 P10.4 U2.14
MOSI_T88: P9.4 R31.1
NetC11_2: C11.2 MCP2.14 R26.2
NetC15_2: C15.2 MCP3.14 R27.2
NetC19_2: C19.2 MCP4.14 R28.2
NetC23_2: C23.2 MCP5.14 R29.2
NetC27_2: C27.2 MCP6.14 R34.2
NetK1_U_rel_ladder1_4: K1_U_rel_ladder1.4 K2_U_rel_ladder1.3 R14_U_rel_ladder1.2 R16_U_rel_ladder1.1 | length 12.9
  Top Layer w0.3: K1_U_rel_ladder1.4@61.396,31.368 61.391,31.363 61.391,29.293 61.385,29.288 69.884,29.288 69.884,29.538 69.429,29.994 K2_U_rel_ladder1.3@69.429,31.368
NetK1_U_rel_ladder1_6: K1_U_rel_ladder1.6 K2_U_rel_ladder1.7 R13_U_rel_ladder1.2 R15_U_rel_ladder1.1 | length 13
  Top Layer w0.3: K1_U_rel_ladder1.6@59.186,37.558 59.186,38.919 58.69,39.415 58.69,39.665 67.219,39.665 R13_U_rel_ladder1.2@67.229,39.656 ; K2_U_rel_ladder1.7@67.219,37.558 K2_U_rel_ladder1.7@67.229,37.568 R13_U_rel_ladder1.2@67.229,39.656 ; R13_U_rel_ladder1.2@67.238,39.665 R13_U_rel_ladder1.2@67.229,39.656
NetK1_U_rel_ladder1_8: K1_U_rel_ladder1.8 ULN3.17 | length 8.2
  Top Layer w0.2: ULN3.17@48.325,39.934 48.341,39.95 48.341,40.25 48.7,40.609 52.525,40.609 53.821,39.313 K1_U_rel_ladder1.8@53.821,37.577
NetK1_U_rel_ladder2_4: K1_U_rel_ladder2.4 K2_U_rel_ladder2.3 R14_U_rel_ladder2.2 R16_U_rel_ladder2.1 | length 12.9
  Top Layer w0.3: K1_U_rel_ladder2.4@61.396,44.068 61.391,44.063 61.391,41.993 61.385,41.988 69.884,41.988 69.884,42.238 69.429,42.694 K2_U_rel_ladder2.3@69.429,44.068
NetK1_U_rel_ladder2_6: K1_U_rel_ladder2.6 K2_U_rel_ladder2.7 R13_U_rel_ladder2.2 R15_U_rel_ladder2.1 | length 13
  Top Layer w0.3: K1_U_rel_ladder2.6@59.186,50.258 59.186,51.619 58.69,52.115 58.69,52.365 67.219,52.365 R13_U_rel_ladder2.2@67.229,52.356 ; K2_U_rel_ladder2.7@67.219,50.258 K2_U_rel_ladder2.7@67.229,50.268 R13_U_rel_ladder2.2@67.229,52.356 ; R13_U_rel_ladder2.2@67.238,52.365 R13_U_rel_ladder2.2@67.229,52.356
NetK1_U_rel_ladder2_8: K1_U_rel_ladder2.8 ULN4.17 | length 8.2
  Top Layer w0.2: ULN4.17@48.325,52.634 48.341,52.65 48.341,52.95 48.7,53.309 52.525,53.309 53.821,52.013 K1_U_rel_ladder2.8@53.821,50.277
NetK1_U_rel_ladder3_4: K1_U_rel_ladder3.4 K2_U_rel_ladder3.3 R14_U_rel_ladder3.2 R16_U_rel_ladder3.1 | length 12.9
  Top Layer w0.3: K1_U_rel_ladder3.4@61.396,56.768 61.391,56.763 61.391,54.693 61.385,54.688 69.884,54.688 69.884,54.938 69.429,55.394 K2_U_rel_ladder3.3@69.429,56.768
NetK1_U_rel_ladder3_6: K1_U_rel_ladder3.6 K2_U_rel_ladder3.7 R13_U_rel_ladder3.2 R15_U_rel_ladder3.1 | length 13
  Top Layer w0.3: K1_U_rel_ladder3.6@59.186,62.958 59.186,64.319 58.69,64.815 58.69,65.065 67.219,65.065 R13_U_rel_ladder3.2@67.229,65.056 ; K2_U_rel_ladder3.7@67.219,62.958 K2_U_rel_ladder3.7@67.229,62.968 R13_U_rel_ladder3.2@67.229,65.056 ; R13_U_rel_ladder3.2@67.238,65.065 R13_U_rel_ladder3.2@67.229,65.056
NetK1_U_rel_ladder3_8: K1_U_rel_ladder3.8 ULN5.17 | length 8.2
  Top Layer w0.2: ULN5.17@48.325,65.334 48.341,65.35 48.341,65.65 48.7,66.009 52.525,66.009 53.821,64.713 K1_U_rel_ladder3.8@53.821,62.977
NetK1_U_rel_ladder4_4: K1_U_rel_ladder4.4 K2_U_rel_ladder4.3 R14_U_rel_ladder4.2 R16_U_rel_ladder4.1 | length 12.9
  Top Layer w0.3: K1_U_rel_ladder4.4@61.396,69.468 61.391,69.463 61.391,67.393 61.385,67.388 69.884,67.388 69.884,67.638 69.429,68.094 K2_U_rel_ladder4.3@69.429,69.468
NetK1_U_rel_ladder4_6: K1_U_rel_ladder4.6 K2_U_rel_ladder4.7 R13_U_rel_ladder4.2 R15_U_rel_ladder4.1 | length 13
  Top Layer w0.3: K1_U_rel_ladder4.6@59.186,75.658 59.186,77.019 58.69,77.515 58.69,77.765 67.219,77.765 R13_U_rel_ladder4.2@67.229,77.756 ; K2_U_rel_ladder4.7@67.219,75.658 K2_U_rel_ladder4.7@67.229,75.668 R13_U_rel_ladder4.2@67.229,77.756 ; R13_U_rel_ladder4.2@67.238,77.765 R13_U_rel_ladder4.2@67.229,77.756
NetK1_U_rel_ladder4_8: K1_U_rel_ladder4.8 ULN6.17 | length 8.2
  Top Layer w0.2: ULN6.17@48.325,78.034 48.341,78.05 48.341,78.35 48.7,78.709 52.525,78.709 53.821,77.413 K1_U_rel_ladder4.8@53.821,75.677
NetK1_U_rel_ladder5_4: K1_U_rel_ladder5.4 K2_U_rel_ladder5.3 R14_U_rel_ladder5.2 R16_U_rel_ladder5.1 | length 12.9
  Top Layer w0.3: K1_U_rel_ladder5.4@61.396,82.168 61.391,82.163 61.391,80.093 61.385,80.088 69.884,80.088 69.884,80.338 69.429,80.794 K2_U_rel_ladder5.3@69.429,82.168
NetK1_U_rel_ladder5_6: K1_U_rel_ladder5.6 K2_U_rel_ladder5.7 R13_U_rel_ladder5.2 R15_U_rel_ladder5.1 | length 13
  Top Layer w0.3: K1_U_rel_ladder5.6@59.186,88.358 59.186,89.719 58.69,90.215 58.69,90.465 67.219,90.465 R13_U_rel_ladder5.2@67.229,90.456 ; K2_U_rel_ladder5.7@67.219,88.358 K2_U_rel_ladder5.7@67.229,88.368 R13_U_rel_ladder5.2@67.229,90.456 ; R13_U_rel_ladder5.2@67.238,90.465 R13_U_rel_ladder5.2@67.229,90.456
NetK1_U_rel_ladder5_8: K1_U_rel_ladder5.8 ULN7.17 | length 8.2
  Top Layer w0.2: ULN7.17@48.325,90.734 48.341,90.75 48.341,91.05 48.7,91.409 52.525,91.409 53.821,90.113 K1_U_rel_ladder5.8@53.821,88.377
NetK1_U_rel_ladder6_4: K1_U_rel_ladder6.4 K2_U_rel_ladder6.3 R14_U_rel_ladder6.2 R16_U_rel_ladder6.1 | length 12.9
  Bottom Layer w0.3: K1_U_rel_ladder6.4@61.4,88.4 61.397,88.403 61.397,90.504 R16_U_rel_ladder6.1@61.394,90.507 R14_U_rel_ladder6.2@69.906,90.507 69.906,90.257 69.433,89.784 K2_U_rel_ladder6.3@69.433,88.4
NetK1_U_rel_ladder6_6: K1_U_rel_ladder6.6 K2_U_rel_ladder6.7 R13_U_rel_ladder6.2 R15_U_rel_ladder6.1 | length 12.2
  Bottom Layer w0.3: K1_U_rel_ladder6.6@59.2,81.521 59.2,80.9 59.024,80.724 59.008,80.724 58.699,80.416 R15_U_rel_ladder6.1@58.699,80.166 R13_U_rel_ladder6.2@67.256,80.166 67.244,80.178 67.244,82.188 K2_U_rel_ladder6.7@67.233,82.2
NetK1_U_rel_ladder6_8: K1_U_rel_ladder6.8 ULN8.17 | length 8.2
  Bottom Layer w0.2: ULN8.17@48.304,79.807 48.304,79.507 48.631,79.18 52.452,79.18 53.804,80.532 53.804,82.196 K1_U_rel_ladder6.8@53.8,82.2
NetK1_U_rel_ladder7_4: K1_U_rel_ladder7.4 K2_U_rel_ladder7.3 R14_U_rel_ladder7.2 R16_U_rel_ladder7.1 | length 12.9
  Bottom Layer w0.3: K1_U_rel_ladder7.4@61.396,75.668 61.393,75.671 61.393,77.772 R16_U_rel_ladder7.1@61.39,77.775 R14_U_rel_ladder7.2@69.902,77.775 69.902,77.525 69.429,77.052 K2_U_rel_ladder7.3@69.429,75.668
NetK1_U_rel_ladder7_6: K1_U_rel_ladder7.6 K2_U_rel_ladder7.7 R13_U_rel_ladder7.2 R15_U_rel_ladder7.1 | length 12.2
  Bottom Layer w0.3: K1_U_rel_ladder7.6@59.196,68.789 59.196,68.168 59.02,67.992 59.004,67.992 58.695,67.684 R15_U_rel_ladder7.1@58.695,67.434 R13_U_rel_ladder7.2@67.252,67.434 67.24,67.446 67.24,69.456 K2_U_rel_ladder7.7@67.229,69.468
NetK1_U_rel_ladder7_8: K1_U_rel_ladder7.8 ULN9.17 | length 8.2
  Bottom Layer w0.2: ULN9.17@48.3,67.075 48.3,66.775 48.627,66.448 52.448,66.448 53.8,67.8 53.8,69.464 K1_U_rel_ladder7.8@53.796,69.468
NetK1_U_rel_ladder8_4: K1_U_rel_ladder8.4 K2_U_rel_ladder8.3 R14_U_rel_ladder8.2 R16_U_rel_ladder8.1 | length 12.9
  Bottom Layer w0.3: K1_U_rel_ladder8.4@61.396,62.968 61.393,62.971 61.393,65.072 R16_U_rel_ladder8.1@61.39,65.075 R14_U_rel_ladder8.2@69.902,65.075 69.902,64.825 69.429,64.352 K2_U_rel_ladder8.3@69.429,62.968
NetK1_U_rel_ladder8_6: K1_U_rel_ladder8.6 K2_U_rel_ladder8.7 R13_U_rel_ladder8.2 R15_U_rel_ladder8.1 | length 12.2
  Bottom Layer w0.3: K1_U_rel_ladder8.6@59.196,56.089 59.196,55.468 59.02,55.292 59.004,55.292 58.695,54.984 R15_U_rel_ladder8.1@58.695,54.734 R13_U_rel_ladder8.2@67.252,54.734 67.24,54.746 67.24,56.756 K2_U_rel_ladder8.7@67.229,56.768
NetK1_U_rel_ladder8_8: K1_U_rel_ladder8.8 ULN10.17 | length 8.2
  Bottom Layer w0.2: ULN10.17@48.323,54.375 48.317,54.369 48.317,54.058 48.675,53.7 52.4,53.7 53.8,55.1 53.8,56.764 K1_U_rel_ladder8.8@53.796,56.768
NetK1_U_rel_ladder9_4: K1_U_rel_ladder9.4 K2_U_rel_ladder9.3 R14_U_rel_ladder9.2 R16_U_rel_ladder9.1 | length 12.9
  Bottom Layer w0.3: K1_U_rel_ladder9.4@61.382,50.268 61.379,50.271 61.379,52.372 R16_U_rel_ladder9.1@61.375,52.375 R14_U_rel_ladder9.2@69.888,52.375 69.888,52.125 69.414,51.652 K2_U_rel_ladder9.3@69.414,50.268
NetK1_U_rel_ladder9_6: K1_U_rel_ladder9.6 K2_U_rel_ladder9.7 R13_U_rel_ladder9.2 R15_U_rel_ladder9.1 | length 12.2
  Bottom Layer w0.3: K1_U_rel_ladder9.6@59.182,43.389 59.182,42.768 59.006,42.592 58.989,42.592 58.681,42.284 R15_U_rel_ladder9.1@58.681,42.034 R13_U_rel_ladder9.2@67.238,42.034 67.226,42.046 67.226,44.056 K2_U_rel_ladder9.7@67.214,44.068
NetK1_U_rel_ladder9_8: K1_U_rel_ladder9.8 ULN11.17 | length 8.2
  Bottom Layer w0.2: ULN11.17@48.286,41.675 48.286,41.375 48.612,41.048 52.434,41.048 53.786,42.4 53.786,44.064 K1_U_rel_ladder9.8@53.782,44.068
NetK1_U_rel_ladder10_4: K1_U_rel_ladder10.4 K2_U_rel_ladder10.3 R14_U_rel_ladder10.2 R16_U_rel_ladder10.1 | length 12.9
  Bottom Layer w0.3: K1_U_rel_ladder10.4@61.396,37.568 61.393,37.571 61.393,39.672 R16_U_rel_ladder10.1@61.39,39.675 R14_U_rel_ladder10.2@69.902,39.675 69.902,39.425 69.429,38.952 K2_U_rel_ladder10.3@69.429,37.568
NetK1_U_rel_ladder10_6: K1_U_rel_ladder10.6 K2_U_rel_ladder10.7 R13_U_rel_ladder10.2 R15_U_rel_ladder10.1 | length 12.2
  Bottom Layer w0.3: K1_U_rel_ladder10.6@59.196,30.689 59.196,30.068 59.02,29.892 59.004,29.892 58.695,29.584 R15_U_rel_ladder10.1@58.695,29.334 R13_U_rel_ladder10.2@67.252,29.334 67.24,29.346 67.24,31.356 K2_U_rel_ladder10.7@67.229,31.368
NetK1_U_rel_ladder10_8: K1_U_rel_ladder10.8 ULN12.17 | length 8.4
  Bottom Layer w0.2: ULN12.17@48.275,28.975 48.285,28.965 48.285,28.417 48.402,28.3 52.4,28.3 53.8,29.7 53.8,31.364 K1_U_rel_ladder10.8@53.796,31.368
NetK2_U_rel_ladder1_4: K2_U_rel_ladder1.4 K3_U_rel_ladder1.3 R12_U_rel_ladder1.2 R14_U_rel_ladder1.1 | length 12.9
  Top Layer w0.3: K2_U_rel_ladder1.4@71.629,31.368 71.623,31.363 71.623,29.293 71.618,29.288 80.117,29.288 80.117,29.538 79.661,29.994 K3_U_rel_ladder1.3@79.661,31.368
NetK2_U_rel_ladder1_6: K2_U_rel_ladder1.6 K3_U_rel_ladder1.7 R11_U_rel_ladder1.2 R13_U_rel_ladder1.1 | length 12.9
  Top Layer w0.3: K2_U_rel_ladder1.6@69.436,37.561 69.436,38.937 68.955,39.418 68.955,39.668 77.454,39.668 77.461,39.661 K3_U_rel_ladder1.7@77.461,37.568 K3_U_rel_ladder1.7@77.468,37.561
NetK2_U_rel_ladder1_8: K2_U_rel_ladder1.8 ULN3.16 | length 18.7
  Top Layer w0.2: ULN3.16@48.825,39.934 48.825,39.932 48.848,39.909 v1(49.625,39.909) ; v1(63.225,37.509) 63.986,37.509 K2_U_rel_ladder1.8@64.054,37.577
  Mid Layer 1 w0.2: v1(49.625,39.909) 51.425,39.909 52.925,38.409 52.925,36.326 53.042,36.209 62.225,36.209 63.204,37.188 63.204,37.488 v1(63.225,37.509)
NetK2_U_rel_ladder2_4: K2_U_rel_ladder2.4 K3_U_rel_ladder2.3 R12_U_rel_ladder2.2 R14_U_rel_ladder2.1 | length 12.9
  Top Layer w0.3: K2_U_rel_ladder2.4@71.629,44.068 71.623,44.063 71.623,41.993 71.618,41.988 80.117,41.988 80.117,42.238 79.661,42.694 K3_U_rel_ladder2.3@79.661,44.068
NetK2_U_rel_ladder2_6: K2_U_rel_ladder2.6 K3_U_rel_ladder2.7 R11_U_rel_ladder2.2 R13_U_rel_ladder2.1 | length 12.9
  Top Layer w0.3: K2_U_rel_ladder2.6@69.436,50.261 69.436,51.637 68.955,52.118 68.955,52.368 77.454,52.368 77.461,52.361 K3_U_rel_ladder2.7@77.461,50.268 K3_U_rel_ladder2.7@77.468,50.261
NetK2_U_rel_ladder2_8: K2_U_rel_ladder2.8 ULN4.16 | length 18.7
  Top Layer w0.2: ULN4.16@48.825,52.634 48.825,52.632 ULN4.16@48.848,52.609 v1(49.625,52.609) ; v1(63.225,50.209) 63.986,50.209 K2_U_rel_ladder2.8@64.054,50.277
  Mid Layer 1 w0.2: v1(49.625,52.609) 51.425,52.609 52.925,51.109 52.925,49.026 53.042,48.909 62.225,48.909 63.204,49.888 63.204,50.188 v1(63.225,50.209)
NetK2_U_rel_ladder3_4: K2_U_rel_ladder3.4 K3_U_rel_ladder3.3 R12_U_rel_ladder3.2 R14_U_rel_ladder3.1 | length 12.9
  Top Layer w0.3: K2_U_rel_ladder3.4@71.629,56.768 71.623,56.763 71.623,54.693 71.618,54.688 80.117,54.688 80.117,54.938 79.661,55.394 K3_U_rel_ladder3.3@79.661,56.768
NetK2_U_rel_ladder3_6: K2_U_rel_ladder3.6 K3_U_rel_ladder3.7 R11_U_rel_ladder3.2 R13_U_rel_ladder3.1 | length 12.9
  Top Layer w0.3: K2_U_rel_ladder3.6@69.436,62.961 69.436,64.337 68.955,64.818 68.955,65.068 77.454,65.068 77.461,65.061 K3_U_rel_ladder3.7@77.461,62.968 K3_U_rel_ladder3.7@77.468,62.961
NetK2_U_rel_ladder3_8: K2_U_rel_ladder3.8 ULN5.16 | length 18.7
  Top Layer w0.2: ULN5.16@48.825,65.334 48.825,65.332 48.848,65.309 v1(49.625,65.309) ; v1(63.225,62.909) 63.986,62.909 K2_U_rel_ladder3.8@64.054,62.977
  Mid Layer 1 w0.2: v1(49.625,65.309) 51.425,65.309 52.925,63.809 52.925,61.726 53.042,61.609 62.225,61.609 63.204,62.588 63.204,62.888 v1(63.225,62.909)
NetK2_U_rel_ladder4_4: K2_U_rel_ladder4.4 K3_U_rel_ladder4.3 R12_U_rel_ladder4.2 R14_U_rel_ladder4.1 | length 12.9
  Top Layer w0.3: K2_U_rel_ladder4.4@71.629,69.468 71.623,69.463 71.623,67.393 71.618,67.388 80.117,67.388 80.117,67.638 79.661,68.094 K3_U_rel_ladder4.3@79.661,69.468
NetK2_U_rel_ladder4_6: K2_U_rel_ladder4.6 K3_U_rel_ladder4.7 R11_U_rel_ladder4.2 R13_U_rel_ladder4.1 | length 12.9
  Top Layer w0.3: K2_U_rel_ladder4.6@69.436,75.661 69.436,77.037 68.955,77.518 68.955,77.768 77.454,77.768 77.461,77.761 K3_U_rel_ladder4.7@77.461,75.668 K3_U_rel_ladder4.7@77.468,75.661
NetK2_U_rel_ladder4_8: K2_U_rel_ladder4.8 ULN6.16 | length 18.7
  Top Layer w0.2: ULN6.16@48.825,78.034 48.825,78.032 48.848,78.009 v1(49.625,78.009) ; v1(63.225,75.609) 63.986,75.609 K2_U_rel_ladder4.8@64.054,75.677
  Mid Layer 1 w0.2: v1(49.625,78.009) 51.425,78.009 52.925,76.509 52.925,74.426 53.042,74.309 62.225,74.309 63.204,75.288 63.204,75.588 v1(63.225,75.609)